# Altium PCB KUOZHAN.PCBDOC (part 1 of 21)
Units mm, origin at the board's own origin, x right, y up, seen from the top; angles counter-clockwise.
Board outline 165.51 x 116.38 mm, 2 copper layers (Top Layer, Bottom Layer); 171 components, 245 nets, 894 pads, 298 vias.
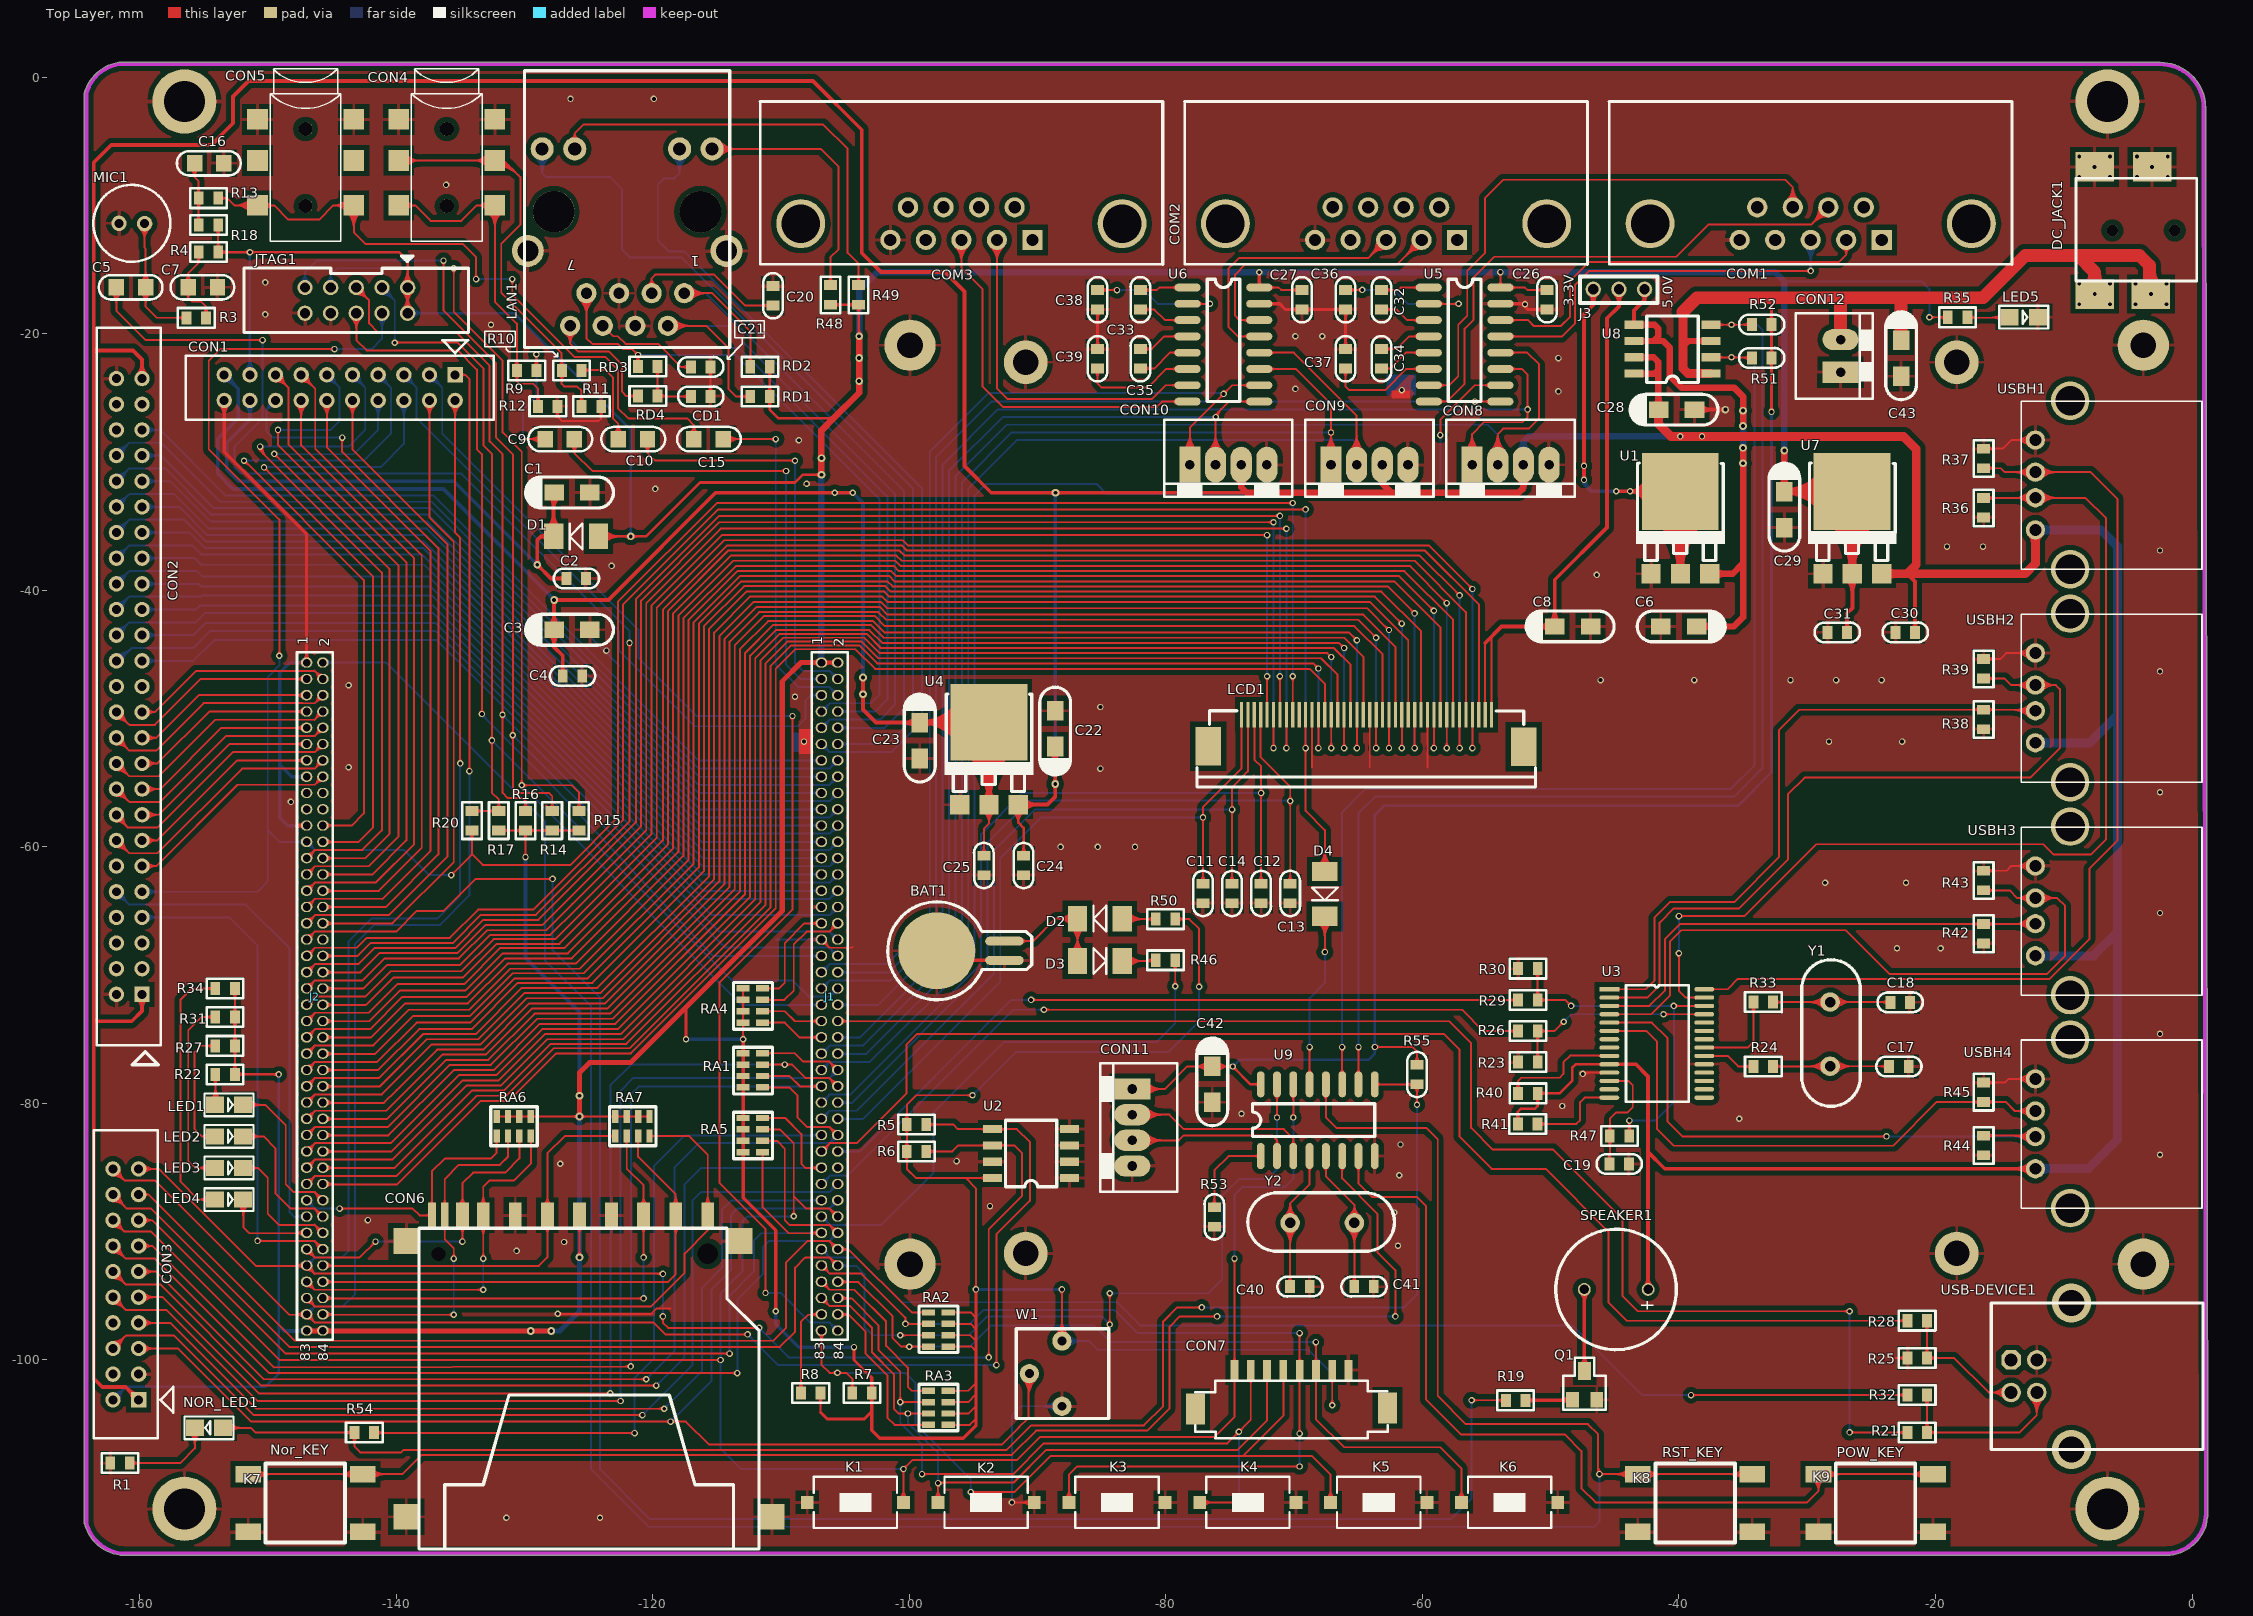
[diagram p0: Top Layer view]
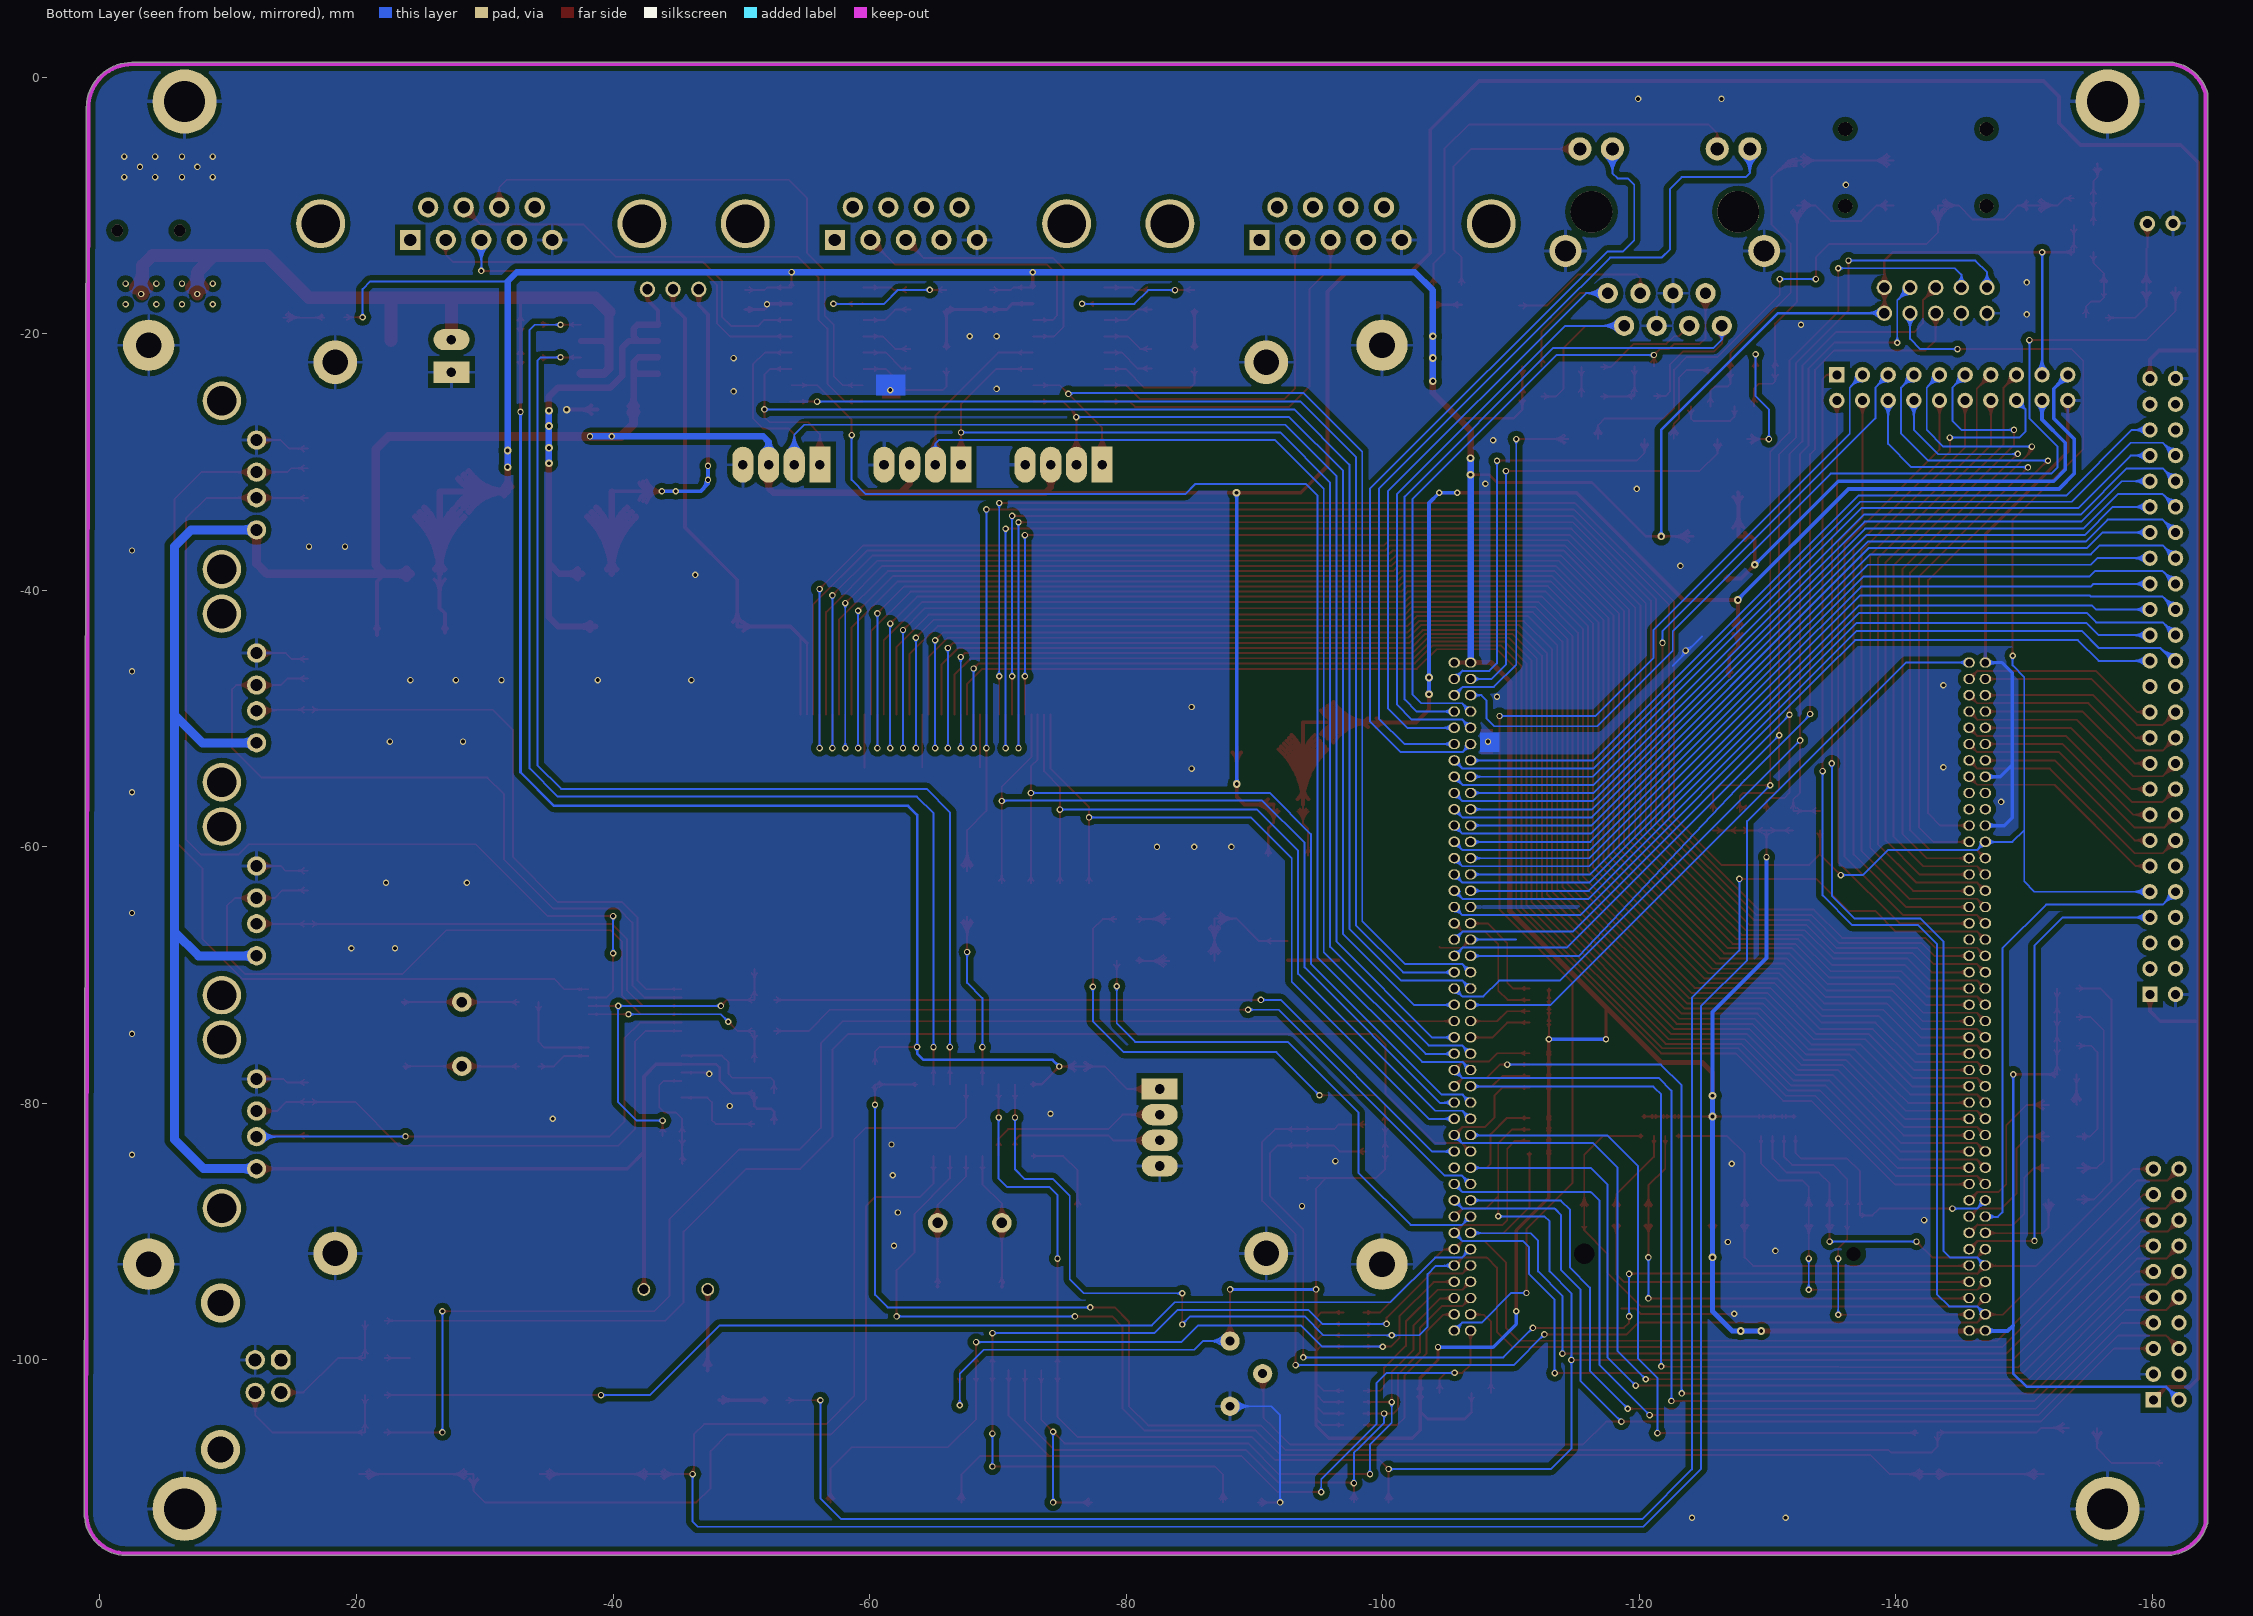
[diagram p1: Bottom Layer view, seen from below]

## Layer stack, top to bottom
Top Layer: signal copper 0.0356
Dielectric: core 0.32, FR-4, Dk 4.8
Bottom Layer: signal copper 0.0356

## Board outline
-164.292,-112.7 -164.292,-112.676 cw(c-161.1,-111.96) -164.293,-112.672 cw(c-164.146,-112.639) -164.292,-112.602 -164.292,-1.335 cw(c-164.145,-1.305) -164.291,-1.267 cw(c-161.123,-2.085) -161.623,1.149 cw(c-161.6,1) -161.6,1.15 -2.5,1.15 cw(c-2.5,-2.4) 1.047,-2.253 cw(c0.904,-2.3) 1.054,-2.3 1.213,-112.2 cw(c1.063,-112.2) 1.198,-112.266 cw(c-2.059,-111.956) -1.723,-115.21 cw(c-1.8,-115.081) -1.8,-115.231 -161.2,-115.231 cw(c-161.2,-115.081) -161.227,-115.229 cw(c-161.1,-111.96) -164.266,-112.785 cw(c-164.142,-112.7)

## Design rules (kind name [scope] priority, off if disabled: settings)
Clearance [All] p1: gap=0.15
FabricationTestPointUsage TestPointUsage [All] p1: valid=0 allowmultiple=FALSE
FabricationTestpoint Testpoint [All] p1: side=3 testpointundercomponent=TRUE minsize=1.016 maxsize=2.54 preferedsize=1.524 minholesize=0 maxholesize=1.016 preferedholesize=0.813 testpointgrid=0.025 allowsidetop=TRUE allowsidebottom=TRUE usegrid=TRUE gridtolerance=0
PolygonConnect GND-Via [IsVia] p1: connectstyle=Direct reliefconductorwidth=0.254 reliefentries=4 polygonreliefangle="90 Angle"
PolygonConnect [All] p2: connectstyle=Relief reliefconductorwidth=0.254 reliefentries=4 polygonreliefangle="90 Angle"
RoutingVias [All] p1: holewidth=0.5 width=0.8 viastyle="Through Hole" minholewidth=0.2 minwidth=0.4 maxholewidth=4 maxwidth=5
SilkscreenOverComponentPads [All] p1: minsilkscreentomaskgap=0.254
SolderMaskExpansion [All] p1: expansion=0.1
Width [All] p1: maxlimit=1 minlimit=0.15 preferedwidth=0.3
25 further rules are at their usual default settings.

## Classes and differential pairs
component class UART_USB_POWER: C22 C23 C24 C25 C26 C27 C28 C29 C30 C31 C32 C33 C34 C35 C36 C37 C38 C39 C40 C41 C42 C43 COM1 COM2 COM3 CON8 CON9 CON10 CON11 CON12 D4 DC_JACK1 K7 K8 K9 NOR_LED1 R1 R51 R52 R53 R54 R55 U4 U5 U6 U7 U8 U9 Y2
component class SD_LAN: BAT1 C17 C18 C19 C20 C21 CD1 CON6 CON7 D2 D3 K1 K2 K3 K4 K5 K6 LAN1 LED1 LED2 LED3 LED4 LED5 R21 R22 R23 R24 R25 R26 R27 R28 R29 R30 R31 R32 R33 R34 R35 R36 R37 R38 R39 R40 R41 R42 R43 R44 R45 R46 R47 R48 R49 R50 RA6 RA7 RD1 RD2 RD3 RD4 U3 USB-DEVICE1 USBH1 USBH2 USBH3 USBH4 Y1
component class INTERFACE: C5 C6 C7 C8 C9 C10 C11 C12 C13 C14 C15 C16 CON4 CON5 J3 JTAG1 LCD1 MIC1 Q1 R3 R4 R5 R6 R7 R8 R9 R10 R11 R12 R13 R14 R15 R16 R17 R18 R19 R20 RA1 RA2 RA3 RA4 RA5 SPEAKER1 U1 U2 W1
component class Audio: C1 C2 C3 C4 CON1 CON2 CON3 D1 J1 J2

## Components (designator, comment, footprint, x,y, rotation, side; value= is the part's Value field where it differs from the comment)
BAT1 "BATTERY" BATT -94.8,-68.1 r0 top
C1 "10uF" 3216A -127.7,-32.4 r180 top
C2 "104" 0603A -126.7,-39.1 r0 top
C3 "10uF" 3216A -127.7,-43.1 r180 top
C4 "104" 0603A -127,-46.7 r0 top
C5 "10uF" 0805C -161.8,-16.4 r270 top
C6 "10uF" 3216A -38.6,-42.8 r0 top
C7 "10uF" 0805C -156.2,-16.4 r270 top
C8 "10uF" 3216A -49.7,-42.842 r180 top
C9 "10uF" 0805C -126.1,-28.2 r90 top
C10 "10uF" 0805C -120.4,-28.2 r90 top
C11 "222" 0603A -77.083,-64.39 r90 top
C12 "222" 0603A -72.55,-64.39 r90 top
C13 "222" 0603A -70.283,-64.39 r90 top
C14 "222" 0603A -74.817,-64.39 r90 top
C15 "10uF" 0805C -114.5,-28.2 r90 top
C16 "10uF" 0805C -155.7,-6.732 r270 top
C17 "15p" 0603A -22.1,-77.1 r180 top
C18 "15p" 0603A -22,-72.1 r180 top
C19 "104" 0603A -43.9,-84.7 r180 top
C20 "104" 0603A -110.6,-17.8 r90 top
C21 "104" 0603A -117,-22.6 r0 top
C22 "10uF" 3216A -88.6,-52.2 r270 top
C23 "10uF" 3216A -99.2,-50.3 r90 top
C24 "104" 0603A -91.1,-60.7 r270 top
C25 "104" 0603A -94.2,-60.7 r270 top
C26 "104" 0603A -50.3,-16.6 r270 top
C27 "104" 0603A -69.4,-16.6 r270 top
C28 "10uF" 3216A -41.6,-25.942 r180 top
C29 "10uF" 3216A -31.8,-32.3 r90 top
C30 "104" 0603A -21.6,-43.262 r180 top
C31 "104" 0603A -26.9,-43.262 r180 top
C32 "104" 0603A -63.2,-16.6 r270 top
C33 "104" 0603A -82,-16.6 r270 top
C34 "104" 0603A -63.2,-21.2 r270 top
C35 "104" 0603A -82,-21.2 r270 top
C36 "104" 0603A -66,-16.6 r270 top
C37 "104" 0603A -65.967,-22.71 r90 top
C38 "104" 0603A -85.333,-16.6 r270 top
C39 "104" 0603A -85.3,-22.71 r90 top
C40 "104" 0603A -70.3,-94.3 r0 top
C41 "104" 0603A -65.3,-94.3 r0 top
C42 "10uF" 3216A -76.4,-77.1 r90 top
C43 "10uF" 3216A -22.7,-20.5 r90 top
CD1 "104" 0603A -117,-24.9 r0 top
COM1 "" DB9RA/M -24.2,-12.7 r0 top
COM2 "" DB9RA/M -57.3,-12.7 r0 top
COM3 "" DB9RA/M -90.4,-12.7 r0 top
CON1 "CON20" IDC20SS -135.4,-23.2 r0 top
CON2 "IDC25x2" IDC25X2 -159.8,-71.5 r180 top
CON3 "HEADER 10X2" IDC20SS -160.065,-103.1 r270 top
CON4 "EARJACK" MIN_PHONE -139.8,-10 r0 top
CON5 "MIC_IN" MIN_PHONE -150.8,-10 r0 top
CON6 "SD/MMC CARD" SDCARD -118.2,-88.7 r180 top
CON7 "CON8" SMD8 -70.2,-102.3 r0 top
CON8 "CON4" SIP4-FA2 -56.1,-30.2 r0 top
CON9 "CON4" SIP4-FA2 -67.1,-30.2 r0 top
CON10 "CON4" SIP4-FA2 -78.1,-30.2 r0 top
CON11 "CON4" SIP4-FA2 -82.6,-78.9 r270 top
CON12 "CON12" SIP2-FA2 -27.4,-23 r90 top
D1 "1N4148" D1206 -124.2,-35.8 r180 top
D2 "1N4148" D1206 -83.371,-65.6 r180 top
D3 "1N4148" D1206 -86.9,-68.9 r0 top
D4 "1N4007" D1206 -67.6,-61.9 r270 top
DC_JACK1 "Header 4" DC-33 -7.6,-7 r0 top
J1 "CONN PLUG 42 x 2" DIP84 -106.841,-45.638 r0 top locked
J2 "CONN PLUG 42 x 2" DIP84 -146.973,-45.638 r0 top locked
J3 "J3" SIP3S -46.7,-16.6 r0 top
JTAG1 "HEADER 4X2" IDC10S -139.1,-16.4 r180 top
K1 "RST_KEY" SW-PB2 -104.2,-111.1 r180 top
K2 "RST_KEY" SW-PB2 -94,-111.1 r0 top
K3 "RST_KEY" SW-PB2 -83.8,-111.1 r0 top
K4 "RST_KEY" SW-PB2 -73.6,-111.1 r0 top
K5 "RST_KEY" SW-PB2 -63.4,-111.1 r0 top
K6 "RST_KEY" SW-PB2 -53.2,-111.1 r0 top
K7 "Nor_KEY" KEY-4 -142.6,-113.4 r180 top
K8 "RST_KEY" KEY-4 -43.2,-108.9 r0 top
K9 "POW_KEY" KEY-4 -20.2,-113.4 r180 top
LAN1 "HR911103A" HR911103A -122,-10.5 r0 top
LCD1 "LCD41P" LCD-40 -54.6,-49.7 r180 top
LED1 "GREEN" LED -154.1,-80.1 r0 top
LED2 "GREEN" LED -154.1,-82.561 r0 top
LED3 "GREEN" LED -154.1,-85.021 r0 top
LED4 "GREEN" LED -154.1,-87.482 r0 top
LED5 "P-LED" LED -14.2,-18.7 r0 top
MIC1 "MICROPHONE1" MIC2 -160.6,-11.4 r0 top
NOR_LED1 "NOR_LED" LED -153.5,-105.3 r180 top
Q1 "8050" SOT23 -48.3,-103.1 r0 top
R1 "1K" 0603R -162.3,-108 r0 top
R3 "4.7K" 0603R -154.8,-18.8 r180 top
R4 "100" 0603R -155.4,-13.6 r0 top
R5 "10K" 0603R -100.2,-81.6 r0 top
R6 "10K" 0603R -100.2,-83.7 r0 top
R7 "10K" 0603R -102.9,-102.6 r180 top
R8 "10K" 0603R -106.9,-102.6 r180 top
R9 "330" 0603R -130.587,-22.84 r0 top
R10 "330" 0603R -127.087,-22.84 r0 top
R11 "10K" 0603R -124,-25.7 r180 top
R12 "10K" 0603R -127.4,-25.7 r180 top
R13 "4.7K" 0603R -155.4,-9.4 r0 top
R14 "10K" 0603R -127.866,-58.737 r90 top
R15 "10K" 0603R -125.781,-58.737 r90 top
R16 "10K" 0603R -129.951,-58.737 r90 top
R17 "10K" 0603R -132.035,-58.737 r90 top
R18 "100" 0603R -155.4,-11.5 r0 top
R19 "1.5K" 0603R -53.5,-103.1 r0 top
R20 "1K" 0603R -134.038,-57.187 r270 top
R21 "1.5K" 0603R -22.2,-105.6 r0 top
R22 "1K" 0603R -154.1,-77.7 r0 top
R23 "15K" 0603R -51,-76.825 r180 top
R24 "330" 0603R -34.2,-77.069 r0 top
R25 "470K" 0603R -20.651,-99.882 r180 top
R26 "22" 0603R -51,-74.397 r180 top
R27 "1K" 0603R -154.1,-75.467 r0 top
R28 "22" 0603R -22.2,-96.9 r0 top
R29 "22" 0603R -51,-71.969 r180 top
R30 "15K" 0603R -51,-69.54 r180 top
R31 "1K" 0603R -154.1,-73.233 r0 top
R32 "22" 0603R -22.2,-102.7 r0 top
R33 "330" 0603R -34.2,-72.069 r0 top
R34 "1K" 0603R -154.1,-71 r0 top
R35 "560" 0603R -17.5,-18.76 r180 top
R36 "15K" 0603R -16.2,-32.8 r270 top
R37 "15K" 0603R -16.282,-30.5 r90 top
R38 "15K" 0603R -16.2,-49.3 r270 top
R39 "15K" 0603R -16.282,-46.9 r90 top
R40 "15K" 0603R -52.549,-79.172 r0 top
R41 "15K" 0603R -51.013,-81.64 r180 top
R42 "15K" 0603R -16.2,-66 r270 top
R43 "15K" 0603R -16.282,-63.4 r90 top
R44 "15K" 0603R -16.2,-82.5 r270 top
R45 "15K" 0603R -16.282,-79.9 r90 top
R46 "10K" 0603R -80.8,-68.8 r0 top
R47 "1.5K" 0603R -45.4,-82.5 r0 top
R48 "1K" 0603R -106.1,-16.2 r270 top
R49 "1K" 0603R -103.9,-16.2 r270 top
R50 "10K" 0603R -80.8,-65.6 r0 top
R51 "100K" 0603A -34.3,-21.9 r0 top
R52 "100K" 0603A -34.3,-19.3 r0 top
R53 "10K" 0603A -76.2,-89.6 r90 top
R54 "1K" 0603R -141.7,-105.7 r180 top
R55 "1K" 0603A -60.4,-78.5 r90 top
RA1 "10K" R-AR4 -111.4,-78.75 r90 top
RA2 "10K" R-AR4 -98.5,-96.3 r270 top
RA3 "10K" R-AR4 -98.5,-102.4 r270 top
RA4 "10K" R-AR4 -111.4,-73.7 r90 top
RA5 "10K" R-AR4 -111.4,-83.8 r90 top
RA6 "10K" R-AR4 -129.5,-81 r180 top
RA7 "10K" R-AR4 -120.246,-81 r180 top
RD1 "75" 0603R -112.4,-24.849 r0 top
RD2 "75" 0603R -112.4,-22.536 r0 top
RD3 "75" 0603R -119.6,-22.6 r180 top
RD4 "75" 0603R -119.6,-24.9 r180 top
SPEAKER1 "SPEAKER" SPEAKER-9 -44.9,-94.5 r180 top
U1 "LM1117-33" TO-252 -37.6,-38.7 r0 top
U2 "24C08" SOP8-50-160 -87.5,-85.8 r180 top
U3 "AU9254" AU9254 -45,-71.1 r0 top
U4 "LM1117-1.8V" TO-252 -91.5,-56.7 r0 top
U5 "MAX3232SOP" SSOP16 -59.5,-16.4 r90 top
U6 "MAX3232SOP" SSOP16 -78.3,-16.4 r90 top
U7 "LM1117-33" TO-252 -24.2,-38.7 r0 top
U8 "IRF7316" SOP8-50-160 -37.5,-23.1 r180 top
U9 "STC11F02E" SSOP16 -72.6,-84.1 r180 top
USB-DEVICE1 "USB Port A type" USB-B -14.1,-100 r90 top
USBH1 "USB Port A type" USB-A -12.2,-35.3 r90 top
USBH2 "USB Port A type" USB-A -12.2,-51.9 r90 top
USBH3 "USB Port A type" USB-A -12.2,-68.5 r90 top
USBH4 "USB Port A type" USB-A -12.2,-85.1 r90 top
W1 "10K" R_ADJ7 -88.1,-103.6 r90 top
Y1 "12MHz" OSC2PR-1 -28.2,-77.1 r90 top
Y2 "XTAL" OSC2PR-1 -65.3,-89.3 r180 top

## Footprints (in the part's own frame and the unit in brackets; to place one, negate y for a bottom-side part, rotate by r counter-clockwise, add the part's x,y. Pads: shape width x height; smd on the part's side, far side on the other; paste and mask are expansions set on the pad)
0603A [mil]
  rect 30x40 smd: 1(-0.39,0.65) 2(59.61,0.65)
  silkscreen extent -40,-30 99,31
0603R [mil]
  rect 30x40 smd: 1(0.5,-1.59) 2(60.5,-1.59)
  silkscreen extent -26,-32 87,28
0805C [mm]
  rect 1.3x1.2 smd: 1(-0.019,-0.004) 2(-0.019,2.282)
  silkscreen extent -0.97,-1.38 0.93,3.59
3216A [mil]
  rect 60x50 smd: 1(-0.8,-0.83) 2(-110.8,-0.83)
  silkscreen extent -183,-48 87,46
AU9254 [mm]
  rect 1.55x0.33 smd: 1(-0.425,0)
  oval 1.55x0.33 smd: 2(-0.425,-0.65) 3(-0.425,-1.3) 4(-0.425,-1.95) 5(-0.425,-2.6) 6(-0.425,-3.25) 7(-0.425,-3.9) 8(-0.425,-4.55) 9(-0.425,-5.2) 10(-0.425,-5.85) 11(-0.425,-6.5) 12(-0.425,-7.15) 13(-0.425,-7.8) 14(-0.425,-8.45) 15(6.975,-8.45) 16(6.975,-7.8) 17(6.975,-7.15) 18(6.975,-6.5) 19(6.975,-5.85) 20(6.975,-5.2) 21(6.975,-4.55) 22(6.975,-3.9) 23(6.975,-3.25) 24(6.975,-2.6) 25(6.975,-1.95) 26(6.975,-1.3) 27(6.975,-0.65) 28(6.975,0)
  silkscreen extent 0.87,-8.78 5.75,0.33
BATT [mm]
  oval 3x0.7 smd: 1(2.223,0.75) 2(2.223,-0.75)
  round 6 smd: 2(-3.048,0)
  Top Layer lines w0.254: -1.785,-0.75 2.223,-0.75
  silkscreen extent -6.87,-3.82 4.34,3.82
D1206 [mm]
  rect 1.5x2 smd: 1(0.015,0.001) 2(3.515,0.001)
  silkscreen extent 1.26,-1 2.26,1
DB9RA/M [mil]
  rect 62x62 hole 38: 1(0.38,0.31)
  round 62 hole 38: 2(-108.62,0.31) 3(-217.62,0.31) 4(-326.62,0.31) 5(-435.62,0.31) 6(-54.62,100.31) 7(-163.62,100.31) 8(-272.62,100.31) 9(-381.62,100.31)
  round 150 hole 118.11: ""(-710.62,50.31) ""(275.38,50.31)
  silkscreen extent -836,-75 400,425
DC-33 [mm]
  rect 3x2.3 smd: 1(0,0) 2(0.013,-9.906) 3(4.39,-9.906) 4(4.478,0)
  silkscreen extent -1.45,-8.89 7.95,-0.89
DIP84 [mm]
  oval 0.9x0.8 hole 0.6: 1(0,-0.001) 2(1.27,-0.001) 3(0,-1.271) 4(1.27,-1.271) 5(0,-2.541) 6(1.27,-2.541) 7(0,-3.811) 8(1.27,-3.811) 9(0,-5.081) 10(1.27,-5.081) 11(0,-6.351) 12(1.27,-6.351) 13(0,-7.621) 14(1.27,-7.621) 15(0,-8.891) 16(1.27,-8.891) 17(0,-10.161) 18(1.27,-10.161) 19(0,-11.431) 20(1.27,-11.431) 21(0,-12.701) 22(1.27,-12.701) 23(0,-13.971) 24(1.27,-13.971) 25(0,-15.241) 26(1.27,-15.241) 27(0,-16.511) 28(1.27,-16.511) 29(0,-17.781) 30(1.27,-17.781) 31(0,-19.051) 32(1.27,-19.051) 33(0,-20.321) 34(1.27,-20.321) 35(0,-21.591) 36(1.27,-21.591) 37(0,-22.861) 38(1.27,-22.861) 39(0,-24.131) 40(1.27,-24.131) 41(0,-25.401) 42(1.27,-25.401) 43(0,-26.671) 44(1.27,-26.671) 45(0,-27.941) 46(1.27,-27.941) 47(0,-29.211) 48(1.27,-29.211) 49(0,-30.481) 50(1.27,-30.481) 51(0,-31.751) 52(1.27,-31.751) 53(0,-33.021) 54(1.27,-33.021) 55(0,-34.291) 56(1.27,-34.291) 57(0,-35.561) 58(1.27,-35.561) 59(0,-36.831) 60(1.27,-36.831) 61(0,-38.101) 62(1.27,-38.101) 63(0,-39.371) 64(1.27,-39.371) 65(0,-40.641) 66(1.27,-40.641) 67(0,-41.911) 68(1.27,-41.911) 69(0,-43.181) 70(1.27,-43.181) 71(0,-44.451) 72(1.27,-44.451) 73(0,-45.721) 74(1.27,-45.721) 75(0,-46.991) 76(1.27,-46.991) 77(0,-48.261) 78(1.27,-48.261) 79(0,-49.531) 80(1.27,-49.531) 81(0,-50.801) 82(1.27,-50.801) 83(0,-52.071) 84(1.27,-52.071)
  silkscreen extent -0.75,-52.8 2.05,0.8
HR911103A [mm]
  round 1.575 hole 0.889: 1(4.462,-6.344) 2(3.192,-8.884) 3(1.922,-6.344) 4(0.652,-8.884) 5(-0.618,-6.344) 6(-1.888,-8.884) 7(-3.158,-6.344) 8(-4.428,-8.884)
  round 1.8 hole 1.02: 9(6.642,4.906) 10(4.102,4.906) 11(-4.068,4.906) 12(-6.608,4.906)
  round 2.5 hole 1.63: A(7.762,-3.044) B(-7.728,-3.044)
  round 3.25 hole 3.25: C(-5.698,0.006) D(5.732,0.006)
  silkscreen extent -7.98,-10.58 8.02,11.01
IDC10S [mm]
  round 1.2 hole 0.8: 1(-0.001,0.003) 2(-0.001,2.003) 3(1.999,0.003) 4(1.999,2.003) 5(3.999,0.003) 6(3.999,2.003) 7(5.999,0.003) 8(5.999,2.003) 9(7.999,0.003) 10(7.999,2.003)
  silkscreen extent -4.75,-2.47 12.75,3.5
IDC20SS [mm]
  rect 1.2x1.2 hole 0.7: 1(0.006,-0.003)
  round 1.2 hole 0.7: 2(0.006,-2.003) 3(-1.994,-0.003) 4(-1.994,-2.003) 5(-3.994,-0.003) 6(-3.994,-2.003) 7(-5.994,-0.003) 8(-5.994,-2.003) 9(-7.994,-0.003) 10(-7.994,-2.003) 11(-9.994,-0.003) 12(-9.994,-2.003) 13(-11.994,-0.003) 14(-11.994,-2.003) 15(-13.994,-0.003) 16(-13.994,-2.003) 17(-15.994,-0.003) 18(-15.994,-2.003) 19(-17.994,-0.003) 20(-17.994,-2.003)
  silkscreen extent -20.99,-3.5 3.01,2.7
IDC25X2 [mm]
  rect 1.2x1.2 hole 0.7: 1(0,0)
  round 1.2 hole 0.7: 2(2,0) 3(0,-2) 4(2,-2) 5(0,-4) 6(2,-4) 7(0,-6) 8(2,-6) 9(0,-8) 10(2,-8) 11(0,-10) 12(2,-10) 13(0,-12) 14(2,-12) 15(0,-14) 16(2,-14) 17(0,-16) 18(2,-16) 19(0,-18) 20(2,-18) 21(0,-20) 22(2,-20) 23(0,-22) 24(2,-22) 25(0,-24) 26(2,-24) 27(0,-26) 28(2,-26) 29(0,-28) 30(2,-28) 31(0,-30) 32(2,-30) 33(0,-32) 34(2,-32) 35(0,-34) 36(2,-34) 37(0,-36) 38(2,-36) 39(0,-38) 40(2,-38) 41(0,-40) 42(2,-40) 43(0,-42) 44(2,-42) 45(0,-44) 46(2,-44) 47(0,-46) 48(2,-46) 49(0,-48) 50(2,-48)
  silkscreen extent -1.46,-51.96 3.54,5.48
KEY-4 [mm]
  rect 2x1.3 smd: 1(0,0) 2(8.925,0) 3(8.925,-4.5) 4(0,-4.5)
  silkscreen extent 1.38,-5.33 7.58,0.83
LCD-40 [mm]
  rect 0.25x2 smd: 1(0,0) 2(0.5,0) 3(1,0) 4(1.5,0) 5(2,0) 6(2.5,0) 7(3,0) 8(3.5,0) 9(4,0) 10(4.5,0) 11(5,0) 12(5.5,0) 13(6,0) 14(6.5,0) 15(7,0) 16(7.5,0) 17(8,0) 18(8.5,0) 19(9,0) 20(9.5,0) 21(10,0) 22(10.5,0) 23(11,0) 24(11.5,0) 25(12,0) 26(12.5,0) 27(13,0) 28(13.5,0) 29(14,0) 30(14.5,0) 31(15,0) 32(15.5,0) 33(16,0) 34(16.5,0) 35(17,0) 36(17.5,0) 37(18,0) 38(18.5,0) 39(19,0) 40(19.5,0)
  rect 2x3 smd: ""(-2.5,2.5) ""(22.087,2.449)
  silkscreen extent -3.41,-0.3 22.98,5.63
LED [mm]
  rect 1.4x1.27 smd: 1(-0.025,-0.01) 2(2.185,-0.01)
  silkscreen extent -0.82,-0.9 2.99,0.88
MIC2 [mm]
  round 1.2 hole 0.7: 1(1,-0.025) 2(-1,0)
  silkscreen extent -3,-3 3,3
MIN_PHONE [mm]
  rect 1.6x1.6 smd: 1(0,6.7) 2(7.508,6.7) 3(0,3.5) 4(7.508,3.5) 5(0,0) 6(7.508,0)
  round 1.1 hole 1.1: ""(3.75,-0.05) ""(3.75,5.955)
  silkscreen extent 1,-2.8 6.5,10.65
OSC2PR-1 [mil]
  round 60 hole 32: 1(-0.1,0.32) 2(196.9,0.32)
  silkscreen extent -123,-92 327,88
R-AR4 [mm]
  rect 0.5x1.016 smd: 1(-0.004,0.02) 2(0.885,0.02) 3(1.774,0.02) 4(2.663,0.02) 5(2.663,1.544) 6(1.774,1.544) 7(0.885,1.544) 8(-0.004,1.544)
  silkscreen extent -0.51,-0.74 3.12,2.31
R_ADJ7 [mm]
  round 1.5 hole 0.7: 1(-0.007,-0.005) 2(5.073,-0.005) 3(2.533,2.535)
  silkscreen extent -0.97,-3.64 6.03,3.56
SDCARD [mm]
  rect 1x2 smd: 1(0.003,0.029) 2(2.503,0.029) 3(5.003,0.029) 4(7.503,0.029) 5(10.003,0.029) 6(12.503,0.029) 7(15.003,0.029) 8(16.628,0.029) 9(-2.497,0.029)
  rect 0.6x2 smd: 10(19.003,0.029) 11(18.003,0.029)
  rect 2x2 smd: 12(-4.997,2.029) 13(21.003,2.029) 14(21.003,23.529) 15(-7.497,23.529)
  round 1.5 hole 1.6: 16(-2.497,3.029)
  round 1 hole 1.1: 17(18.503,3.029)
  silkscreen extent -6.5,1.03 20,26.03
SIP2-FA2 [mm]
  rect 1.651x2.8 hole 0.75: 1(0,0)
  oval 1.651x2.8 hole 0.75: 2(2.54,0)
  silkscreen extent -2.08,-2.54 4.59,3.5
SIP3S [mm]
  round 1.2 hole 0.8: 1(0.023,0.055) 2(2.023,0.055) 3(4.023,0.055)
  silkscreen extent -1,-1.02 5.02,1.05
SIP4-FA2 [mm]
  rect 1.651x2.8 hole 0.75: 1(-0.022,-0.01)
  oval 1.651x2.8 hole 0.75: 2(1.978,-0.01) 3(3.978,-0.01) 4(5.978,-0.01)
  silkscreen extent -2.02,-2.51 7.97,3.49
SMD8 [mm]
  rect 0.6x1.6 smd: 1(-4.445,1.512) 2(-3.175,1.512) 3(-1.905,1.512) 4(-0.635,1.512) 5(0.635,1.512) 6(1.905,1.512) 7(3.175,1.512) 8(4.445,1.512)
  rect 1.5x2.4 smd: A(-7.49,-1.512) B(7.49,-1.438)
  silkscreen extent -7.49,-3.79 7.49,0.69
SOP8-50-160 [mm]
  rect 1.5x0.635 smd: 1(-0.002,0.012) 2(-0.002,-1.258) 3(-0.002,-2.528) 4(-0.002,-3.798) 5(5.998,-3.798) 6(5.998,-2.528) 7(5.998,-1.258) 8(5.998,0.012)
  silkscreen extent 1,-4.49 5,0.7
SOT23 [mm]
  rect 1x1.2 smd: B(-0.006,-0.008) E(1.894,-0.008)
  rect 1x1.4 smd: C(0.944,2.258)
  silkscreen extent -0.71,-0.79 2.6,3.27
SPEAKER-9 [mm]
  round 1 hole 0.75: 1(-2.5,0) 2(2.475,0)
  silkscreen extent -4.7,-4.7 4.69,4.7
SSOP16 [mil]
  oval 24x80 smd: 1(0,0) 2(-50,0) 3(-100,0) 4(-150,0) 5(-200,0) 6(-250,0) 7(-300,0) 8(-350,0) 9(-350,-220) 10(-300,-220) 11(-250,-220) 12(-200,-220) 13(-150,-220) 14(-100,-220) 15(-50,-220) 16(0,-220)
  silkscreen extent -350,-160 25,-60
SW-PB2 [mm]
  rect 1x1 smd: 1(-3.75,0) 2(3.75,0)
  silkscreen extent -3.25,-2 3.25,2
TO-252 [mm]
  rect 1.5x1.5 smd: 1(0.003,-0.012) 2(-4.569,-0.012) 3(-2.283,-0.012)
  rect 6x6 smd: 4(-2.297,6.413)
  silkscreen extent -5.75,1.01 1.18,8.61
USB-A [mm]
  round 1.5 hole 0.92: 1(0.009,0.013) 2(2.509,0.013) 3(4.509,0.013) 4(7.009,0.013)
  round 3 hole 2.3: 5(10.079,-2.697) 6(-3.061,-2.697)
  silkscreen extent -3.06,-12.98 10.04,1.12
USB-B [mil]
  oct 60x60 hole 40: 1(0.24,0.17)
  round 60 hole 40: 2(-99.76,0.17) 3(-99.76,-78.57) 4(0.24,-78.57)
  round 120 hole 80: 5(175.24,-184.87) 6(-274.76,-184.87)
  silkscreen extent -275,-589 175,61

## Part data
C1 C3 C5 C6 C7 C8 C9 C10 C15 C16 C22 C23 C28 C29 C42 C43: library part CAPACITOR, "Capacitor"
C2 C4 C24 C25 C30 C31: library part CAP, "Capacitor"
C11 C12 C13 C14: library part Cap, "Capacitor"
C17 C18 C19 C26 C27 C32 C33 C34 C35 C36 C37 C38 C39 C40 C41 CD1: library part CAP
C20 C21: library part "CAP NP_0"
COM1 COM2 COM3: library part "CONNECTOR DB9"
CON1 CON7 CON8 CON9 CON10 CON11: "Connector"
CON5: library part EARJACK
CON6: library part SD
CON12: library part "Header 2H", "Header, 2-Pin, Right Angle"
D1 D2 D3 D4: library part DIODE
DC_JACK1: "Header, 4-Pin"
J3: library part CON3, "Connector"
JTAG1: library part "HEADER 5X2"
K1 K2 K3 K4 K5 K6: library part SW-PB, "Switch"
K7 K8 K9: library part PUSHSW
LED1 LED2 LED3 LED4 LED5: library part LED
MIC1: "Microphone"
NOR_LED1: library part LED0, "Typical INFRARED GaAs LED"
Q1: library part NPN
R1 R3 R4 R5 R6 R7 R8 R9 R10 R11 R12 R13 R18 R19 R46 R48 R49 R50 R54: library part RES1
R14 R15 R16 R17 R20 R22 R24 R27 R31 R33 R34 R35: library part RES
R21 R23 R25 R26 R28 R29 R30 R32 R36 R37 R38 R39 R40 R41 R42 R43 R44 R45 R47: library part RESISTOR_2
R51 R52 R53 R55: library part Res2, "Resistor"
RA1 RA2 RA3 RA4 RA5 RA6 RA7: library part RP4R
RD1 RD2 RD3 RD4: library part RES2
U2: library part AT24LC04, "U"
U3: library part USBHUB
U4: library part LM1117-33
U5 U6: library part MAX232SOP
USB-DEVICE1 USBH1 USBH2 USBH3 USBH4: library part USBPORT
W1: library part "RESISTOR TAPPED"
Y1: library part CRYSTAL
Y2: "Crystal Oscillator"

## Free pads (board coordinates)
  round 4 hole 2: 0(-3.8,-92.528) 1(-99.939,-92.528) 1(-99.939,-20.9) 1(-3.8,-20.9)
  round 5 hole 3.2: ""(-156.5,-111.6) ""(-156.5,-1.9) ""(-6.6,-111.6) ""(-6.6,-1.9)
  round 3.4 hole 2: ""(-90.912,-91.693) ""(-90.912,-22.229) ""(-18.341,-91.693) ""(-18.341,-22.229)

## Via types
v1: diameter 0.5, hole 0.3, Top Layer to Bottom Layer, 272 vias
v2: diameter 0.6, hole 0.3, Top Layer to Bottom Layer, 24 vias
v3: diameter 0.9, hole 0.9, Top Layer to Bottom Layer, 2 vias

## Nets (pads, with @x,y where several pads share a name; then routed paths per layer and width w, separated by ;. In a path a pad name is that pad's centre, name@x,y a point inside that pad or via, vN(x,y) a via of type N, cw(c..) or ccw(c..) an arc to the next point about the centre after c; other vN are vias at no path point)
AIN0: CON3.5 J1.68 W1.3 | length 173.1
  Top Layer w0.15: CON3.5@-160.067,-99.106 -156.994,-99.106 -151.3,-104.8 v1(-118.6,-104.8) -117.4,-104.8 -115.6,-106.6 -92.8,-106.6 -91.4,-105.2 ; v1@-118.688,-104.888 ccw(c-118.902,-105.102) -118.902,-104.8 ccw(c-118.902,-104.498) v1@-118.688,-104.712 ; v1@-118.512,-104.888 cw(c-118.298,-105.102) -118.298,-104.8 cw(c-118.298,-104.498) v1@-118.512,-104.712 ; -91.5,-105.3 -90.7,-104.5 W1.3@-90.7,-101 ; CON3.5@-159.802,-99.372 cw(c-159.162,-100.012) -159.162,-99.106 ; CON3.5@-159.802,-99.372 cw(c-159.162,-100.012) -159.162,-99.106 ; CON3.5@-159.802,-99.372 cw(c-159.162,-100.012) -159.162,-99.106 ; CON3.5@-159.802,-99.372 cw(c-159.162,-100.012) -159.162,-99.106 ; CON3.5@-159.802,-99.372 cw(c-159.162,-100.012) -159.162,-99.106 ; CON3.5@-159.802,-98.841 ccw(c-159.162,-98.201) -159.162,-99.106 ; CON3.5@-159.802,-98.841 ccw(c-159.162,-98.201) -159.162,-99.106 ; CON3.5@-159.802,-98.841 ccw(c-159.162,-98.201) -159.162,-99.106 ; CON3.5@-159.802,-98.841 ccw(c-159.162,-98.201) -159.162,-99.106 ; CON3.5@-159.802,-98.841 ccw(c-159.162,-98.201) -159.162,-99.106 ; CON3.5@-159.696,-99.478 cw(c-158.8,-100.374) -158.8,-99.106 ; CON3.5@-159.696,-99.478 cw(c-158.8,-100.374) -158.8,-99.106 ; CON3.5@-159.696,-99.478 cw(c-158.8,-100.374) -158.8,-99.106 ; CON3.5@-159.696,-99.478 cw(c-158.8,-100.374) -158.8,-99.106 ; CON3.5@-159.696,-99.478 cw(c-158.8,-100.374) -158.8,-99.106 ; CON3.5@-159.696,-98.735 ccw(c-158.8,-97.839) -158.8,-99.106 ; CON3.5@-159.696,-98.735 ccw(c-158.8,-97.839) -158.8,-99.106 ; CON3.5@-159.696,-98.735 ccw(c-158.8,-97.839) -158.8,-99.106 ; CON3.5@-159.696,-98.735 ccw(c-158.8,-97.839) -158.8,-99.106 ; CON3.5@-159.696,-98.735 ccw(c-158.8,-97.839) -158.8,-99.106 ; -119.022,-104.8 cw(c-119.022,-105.222) v1@-118.724,-104.924 ; -119.022,-104.8 ccw(c-119.022,-104.378) v1@-118.724,-104.676 ; -119.022,-104.8 cw(c-119.022,-105.222) v1@-118.724,-104.924 ; -119.022,-104.8 ccw(c-119.022,-104.378) v1@-118.724,-104.676 ; -119.022,-104.8 cw(c-119.022,-105.222) v1@-118.724,-104.924 ; -119.022,-104.8 ccw(c-119.022,-104.378) v1@-118.724,-104.676 ; -119.022,-104.8 ccw(c-119.022,-104.378) v1@-118.724,-104.676 ; -119.022,-104.8 cw(c-119.022,-105.222) v1@-118.724,-104.924 ; v1@-118.476,-104.924 cw(c-118.178,-105.222) -118.178,-104.8 ; v1@-118.476,-104.924 cw(c-118.178,-105.222) -118.178,-104.8 ; v1@-118.476,-104.924 cw(c-118.178,-105.222) -118.178,-104.8 ; v1@-118.476,-104.924 cw(c-118.178,-105.222) -118.178,-104.8 ; v1@-118.476,-104.676 ccw(c-118.178,-104.378) -118.178,-104.8 ; v1@-118.476,-104.676 ccw(c-118.178,-104.378) -118.178,-104.8 ; v1@-118.476,-104.676 ccw(c-118.178,-104.378) -118.178,-104.8 ; v1@-118.476,-104.676 ccw(c-118.178,-104.378) -118.178,-104.8 ; W1.3@-91.112,-101.544 cw(c-92.108,-102.539) -90.7,-102.539 ; W1.3@-91.112,-101.544 cw(c-92.108,-102.539) -90.7,-102.539 ; W1.3@-91.112,-101.544 cw(c-92.108,-102.539) -90.7,-102.539 ; W1.3@-91.112,-101.544 cw(c-92.108,-102.539) -90.7,-102.539 ; W1.3@-91.112,-101.544 cw(c-92.108,-102.539) -90.7,-102.539 ; W1.3@-91.006,-101.438 cw(c-91.746,-102.177) -90.7,-102.177 ; W1.3@-91.006,-101.438 cw(c-91.746,-102.177) -90.7,-102.177 ; W1.3@-91.006,-101.438 cw(c-91.746,-102.177) -90.7,-102.177 ; W1.3@-91.006,-101.438 cw(c-91.746,-102.177) -90.7,-102.177 ; W1.3@-91.006,-101.438 cw(c-91.746,-102.177) -90.7,-102.177 ; W1.3@-90.9,-101.332 cw(c-91.384,-101.815) -90.7,-101.815 ; W1.3@-90.9,-101.332 cw(c-91.384,-101.815) -90.7,-101.815 ; W1.3@-90.9,-101.332 cw(c-91.384,-101.815) -90.7,-101.815 ; W1.3@-90.9,-101.332 cw(c-91.384,-101.815) -90.7,-101.815 ; W1.3@-90.9,-101.332 cw(c-91.384,-101.815) -90.7,-101.815 ; -90.7,-102.853 cw(c-88.849,-102.853) W1.3@-90.158,-101.544 ; -90.7,-102.853 cw(c-88.849,-102.853) W1.3@-90.158,-101.544 ; -90.7,-102.853 cw(c-88.849,-102.853) W1.3@-90.158,-101.544 ; -90.7,-102.853 cw(c-88.849,-102.853) W1.3@-90.158,-101.544 ; -90.7,-102.853 cw(c-88.849,-102.853) W1.3@-90.158,-101.544 ; -90.7,-102.491 cw(c-89.211,-102.491) W1.3@-90.264,-101.438 ; -90.7,-102.491 cw(c-89.211,-102.491) W1.3@-90.264,-101.438 ; -90.7,-102.491 cw(c-89.211,-102.491) W1.3@-90.264,-101.438 ; -90.7,-102.491 cw(c-89.211,-102.491) W1.3@-90.264,-101.438 ; -90.7,-102.491 cw(c-89.211,-102.491) W1.3@-90.264,-101.438 ; -90.7,-102.129 cw(c-89.573,-102.129) W1.3@-90.37,-101.332 ; -90.7,-102.129 cw(c-89.573,-102.129) W1.3@-90.37,-101.332 ; -90.7,-102.129 cw(c-89.573,-102.129) W1.3@-90.37,-101.332 ; -90.7,-102.129 cw(c-89.573,-102.129) W1.3@-90.37,-101.332 ; -90.7,-102.129 cw(c-89.573,-102.129) W1.3@-90.37,-101.332
  Bottom Layer w0.15: v1(-118.6,-104.8) -115.4,-101.6 -115.4,-94.5 -113.9,-93 -113.9,-88.7 -113.423,-88.223 ; v1@-118.6,-104.675 ccw(c-118.6,-104.373) -118.387,-104.587 ccw(c-118.173,-104.8) v1@-118.475,-104.8 ; -113.394,-88.194 -106.216,-88.194 J1.68@-105.571,-87.549 ; -106.217,-88.223 J1.68@-105.571,-87.577 ; v1@-118.6,-104.625 ccw(c-118.6,-104.203) -118.301,-104.501 ; v1@-118.6,-104.625 ccw(c-118.6,-104.203) -118.301,-104.501 ; v1@-118.6,-104.625 ccw(c-118.6,-104.203) -118.301,-104.501 ; v1@-118.6,-104.625 ccw(c-118.6,-104.203) -118.301,-104.501 ; v1@-118.425,-104.8 cw(c-118.003,-104.8) -118.301,-104.501 ; v1@-118.425,-104.8 cw(c-118.003,-104.8) -118.301,-104.501 ; v1@-118.425,-104.8 cw(c-118.003,-104.8) -118.301,-104.501 ; v1@-118.425,-104.8 cw(c-118.003,-104.8) -118.301,-104.501 ; -106.126,-88.132 cw(c-105.571,-88.687) J1.68@-105.571,-87.902 ; -106.126,-88.132 ccw(c-106.68,-87.577) J1.68@-105.896,-87.577 ; -106.126,-88.132 cw(c-105.571,-88.687) J1.68@-105.571,-87.902 ; -106.126,-88.132 ccw(c-106.68,-87.577) J1.68@-105.896,-87.577 ; -106.126,-88.132 cw(c-105.571,-88.687) J1.68@-105.571,-87.902 ; -106.126,-88.132 ccw(c-106.68,-87.577) J1.68@-105.896,-87.577 ; -105.87,-87.876 cw(c-105.571,-88.175) J1.68@-105.571,-87.752 ; -105.87,-87.876 ccw(c-106.168,-87.577) J1.68@-105.746,-87.577 ; -105.87,-87.876 cw(c-105.571,-88.175) J1.68@-105.571,-87.752 ; -105.87,-87.876 ccw(c-106.168,-87.577) J1.68@-105.746,-87.577 ; -105.87,-87.876 cw(c-105.571,-88.175) J1.68@-105.571,-87.752 ; -105.87,-87.876 ccw(c-106.168,-87.577) J1.68@-105.746,-87.577 ; J1.68@-105.621,-87.874 ccw(c-105.621,-88.47) -106.042,-88.049 cw(c-105.621,-88.47) J1.68@-105.621,-87.874 ; J1.68@-105.621,-87.874 ccw(c-105.621,-88.538) -106.09,-88.069 cw(c-105.621,-88.538) J1.68@-105.621,-87.874 ; -106.191,-88.169 ccw(c-106.783,-87.577) -105.946,-87.557 cw(c-106.783,-87.577) -106.191,-88.169 ; -106.178,-88.184 ccw(c-106.742,-87.619) -105.945,-87.57 cw(c-106.742,-87.619) -106.178,-88.184 ; -105.943,-87.949 ccw(c-106.3,-87.592) -105.795,-87.56 cw(c-106.3,-87.592) -105.943,-87.949 ; -105.943,-87.922 ccw(c-106.299,-87.566) -105.796,-87.553 cw(c-106.299,-87.566) -105.943,-87.922
AIN1: CON3.6 J1.66 | length 102.8
  Top Layer w0.15: CON3.6@-162.067,-99.106 -161.061,-98.1 -157.3,-98.1 -151.1,-104.3 v1(-120.8,-104.3) ; v1@-120.888,-104.388 ccw(c-121.102,-104.602) -121.102,-104.3 ccw(c-121.102,-103.998) v1@-120.888,-104.212 ; CON3.6@-162.067,-98.731 ccw(c-162.067,-97.826) -161.427,-98.466 ; CON3.6@-162.067,-98.731 ccw(c-162.067,-97.826) -161.427,-98.466 ; CON3.6@-162.067,-98.731 ccw(c-162.067,-97.826) -161.427,-98.466 ; CON3.6@-162.067,-98.731 ccw(c-162.067,-97.826) -161.427,-98.466 ; CON3.6@-162.067,-98.731 ccw(c-162.067,-97.826) -161.427,-98.466 ; CON3.6@-162.067,-98.581 ccw(c-162.067,-97.314) -161.171,-98.21 ; CON3.6@-162.067,-98.581 ccw(c-162.067,-97.314) -161.171,-98.21 ; CON3.6@-162.067,-98.581 ccw(c-162.067,-97.314) -161.171,-98.21 ; CON3.6@-162.067,-98.581 ccw(c-162.067,-97.314) -161.171,-98.21 ; CON3.6@-162.067,-98.581 ccw(c-162.067,-97.314) -161.171,-98.21 ; CON3.6@-161.692,-99.106 cw(c-160.787,-99.106) -161.427,-98.466 ; CON3.6@-161.692,-99.106 cw(c-160.787,-99.106) -161.427,-98.466 ; CON3.6@-161.692,-99.106 cw(c-160.787,-99.106) -161.427,-98.466 ; CON3.6@-161.692,-99.106 cw(c-160.787,-99.106) -161.427,-98.466 ; CON3.6@-161.692,-99.106 cw(c-160.787,-99.106) -161.427,-98.466 ; CON3.6@-161.542,-99.106 cw(c-160.275,-99.106) -161.171,-98.21 ; CON3.6@-161.542,-99.106 cw(c-160.275,-99.106) -161.171,-98.21 ; CON3.6@-161.542,-99.106 cw(c-160.275,-99.106) -161.171,-98.21 ; CON3.6@-161.542,-99.106 cw(c-160.275,-99.106) -161.171,-98.21 ; CON3.6@-161.542,-99.106 cw(c-160.275,-99.106) -161.171,-98.21 ; -121.222,-104.3 cw(c-121.222,-104.722) v1@-120.924,-104.424 ; -121.222,-104.3 ccw(c-121.222,-103.878) v1@-120.924,-104.176 ; -121.222,-104.3 cw(c-121.222,-104.722) v1@-120.924,-104.424 ; -121.222,-104.3 ccw(c-121.222,-103.878) v1@-120.924,-104.176 ; -121.222,-104.3 cw(c-121.222,-104.722) v1@-120.924,-104.424 ; -121.222,-104.3 ccw(c-121.222,-103.878) v1@-120.924,-104.176 ; -121.222,-104.3 ccw(c-121.222,-103.878) v1@-120.924,-104.176 ; -121.222,-104.3 cw(c-121.222,-104.722) v1@-120.924,-104.424
  Bottom Layer w0.15: v1(-120.8,-104.3) -116.9,-100.4 -116.9,-87.6 -116.232,-86.932 ; v1@-120.8,-104.175 ccw(c-120.8,-103.873) -120.587,-104.087 ccw(c-120.373,-104.3) v1@-120.675,-104.3 ; -116.204,-86.904 -106.196,-86.904 J1.66@-105.571,-86.279 ; v1@-120.8,-104.125 ccw(c-120.8,-103.703) -120.501,-104.001 ; v1@-120.8,-104.125 ccw(c-120.8,-103.703) -120.501,-104.001 ; v1@-120.8,-104.125 ccw(c-120.8,-103.703) -120.501,-104.001 ; v1@-120.8,-104.125 ccw(c-120.8,-103.703) -120.501,-104.001 ; v1@-120.625,-104.3 cw(c-120.203,-104.3) -120.501,-104.001 ; v1@-120.625,-104.3 cw(c-120.203,-104.3) -120.501,-104.001 ; v1@-120.625,-104.3 cw(c-120.203,-104.3) -120.501,-104.001 ; v1@-120.625,-104.3 cw(c-120.203,-104.3) -120.501,-104.001 ; -105.87,-86.605 cw(c-105.571,-86.904) J1.66@-105.571,-86.482 ; -105.87,-86.605 ccw(c-106.168,-86.307) J1.66@-105.746,-86.307 ; -105.87,-86.605 cw(c-105.571,-86.904) J1.66@-105.571,-86.482 ; -105.87,-86.605 ccw(c-106.168,-86.307) J1.66@-105.746,-86.307 ; -105.87,-86.605 cw(c-105.571,-86.904) J1.66@-105.571,-86.482 ; -105.87,-86.605 ccw(c-106.168,-86.307) J1.66@-105.746,-86.307 ; -106.171,-86.879 ccw(c-106.717,-86.333) -105.945,-86.295 cw(c-106.717,-86.333) -106.171,-86.879 ; -106.09,-86.799 cw(c-105.621,-87.268) -105.621,-86.604 ccw(c-105.621,-87.268) -106.09,-86.799 ; -105.931,-86.64 ccw(c-106.261,-86.311) -105.796,-86.288 cw(c-106.261,-86.311) -105.931,-86.64
AIN2: CON3.7 J1.67 | length 101.5
  Top Layer w0.15: CON3.7@-160.067,-97.106 -157.594,-97.106 -150.9,-103.8 v1(-119.1,-103.8) ; v1@-119.188,-103.888 ccw(c-119.402,-104.102) -119.402,-103.8 ccw(c-119.402,-103.498) v1@-119.188,-103.712 ; CON3.7@-159.802,-97.372 cw(c-159.162,-98.012) -159.162,-97.106 ; CON3.7@-159.802,-97.372 cw(c-159.162,-98.012) -159.162,-97.106 ; CON3.7@-159.802,-97.372 cw(c-159.162,-98.012) -159.162,-97.106 ; CON3.7@-159.802,-97.372 cw(c-159.162,-98.012) -159.162,-97.106 ; CON3.7@-159.802,-97.372 cw(c-159.162,-98.012) -159.162,-97.106 ; CON3.7@-159.802,-96.841 ccw(c-159.162,-96.201) -159.162,-97.106 ; CON3.7@-159.802,-96.841 ccw(c-159.162,-96.201) -159.162,-97.106 ; CON3.7@-159.802,-96.841 ccw(c-159.162,-96.201) -159.162,-97.106 ; CON3.7@-159.802,-96.841 ccw(c-159.162,-96.201) -159.162,-97.106 ; CON3.7@-159.802,-96.841 ccw(c-159.162,-96.201) -159.162,-97.106 ; CON3.7@-159.696,-97.478 cw(c-158.8,-98.374) -158.8,-97.106 ; CON3.7@-159.696,-97.478 cw(c-158.8,-98.374) -158.8,-97.106 ; CON3.7@-159.696,-97.478 cw(c-158.8,-98.374) -158.8,-97.106 ; CON3.7@-159.696,-97.478 cw(c-158.8,-98.374) -158.8,-97.106 ; CON3.7@-159.696,-97.478 cw(c-158.8,-98.374) -158.8,-97.106 ; CON3.7@-159.696,-96.735 ccw(c-158.8,-95.839) -158.8,-97.106 ; CON3.7@-159.696,-96.735 ccw(c-158.8,-95.839) -158.8,-97.106 ; CON3.7@-159.696,-96.735 ccw(c-158.8,-95.839) -158.8,-97.106 ; CON3.7@-159.696,-96.735 ccw(c-158.8,-95.839) -158.8,-97.106 ; CON3.7@-159.696,-96.735 ccw(c-158.8,-95.839) -158.8,-97.106 ; -119.522,-103.8 cw(c-119.522,-104.222) v1@-119.224,-103.924 ; -119.522,-103.8 ccw(c-119.522,-103.378) v1@-119.224,-103.676 ; -119.522,-103.8 cw(c-119.522,-104.222) v1@-119.224,-103.924 ; -119.522,-103.8 ccw(c-119.522,-103.378) v1@-119.224,-103.676 ; -119.522,-103.8 cw(c-119.522,-104.222) v1@-119.224,-103.924 ; -119.522,-103.8 ccw(c-119.522,-103.378) v1@-119.224,-103.676 ; -119.522,-103.8 ccw(c-119.522,-103.378) v1@-119.224,-103.676 ; -119.522,-103.8 cw(c-119.522,-104.222) v1@-119.224,-103.924
  Bottom Layer w0.15: v1(-119.1,-103.8) -116.15,-100.85 -116.15,-94.35 -114.6,-92.8 -114.6,-88.3 -113.877,-87.577 J1.67@-106.841,-87.577 ; v1@-119.1,-103.675 ccw(c-119.1,-103.373) -118.887,-103.587 ccw(c-118.673,-103.8) v1@-118.975,-103.8 ; v1@-119.1,-103.625 ccw(c-119.1,-103.203) -118.801,-103.501 ; v1@-119.1,-103.625 ccw(c-119.1,-103.203) -118.801,-103.501 ; v1@-119.1,-103.625 ccw(c-119.1,-103.203) -118.801,-103.501 ; v1@-119.1,-103.625 ccw(c-119.1,-103.203) -118.801,-103.501 ; v1@-118.925,-103.8 cw(c-118.503,-103.8) -118.801,-103.501 ; v1@-118.925,-103.8 cw(c-118.503,-103.8) -118.801,-103.501 ; v1@-118.925,-103.8 cw(c-118.503,-103.8) -118.801,-103.501 ; v1@-118.925,-103.8 cw(c-118.503,-103.8) -118.801,-103.501 ; -107.625,-87.577 cw(c-107.625,-88.362) J1.67@-107.071,-87.807 ; -107.625,-87.577 ccw(c-107.625,-86.793) J1.67@-107.071,-87.348 ; -107.625,-87.577 cw(c-107.625,-88.362) J1.67@-107.071,-87.807 ; -107.625,-87.577 ccw(c-107.625,-86.793) J1.67@-107.071,-87.348 ; -107.625,-87.577 cw(c-107.625,-88.362) J1.67@-107.071,-87.807 ; -107.625,-87.577 ccw(c-107.625,-86.793) J1.67@-107.071,-87.348 ; J1.67@-107.263,-87.577 cw(c-107.263,-88) J1.67@-106.965,-87.701 ; J1.67@-107.263,-87.577 ccw(c-107.263,-87.155) J1.67@-106.965,-87.454 ; J1.67@-107.263,-87.577 cw(c-107.263,-88) J1.67@-106.965,-87.701 ; J1.67@-107.263,-87.577 ccw(c-107.263,-87.155) J1.67@-106.965,-87.454 ; J1.67@-107.263,-87.577 cw(c-107.263,-88) J1.67@-106.965,-87.701 ; J1.67@-107.263,-87.577 ccw(c-107.263,-87.155) J1.67@-106.965,-87.454 ; -107.743,-87.577 ccw(c-107.743,-86.697) -107.121,-87.32 cw(c-107.743,-86.697) -107.743,-87.577 ; -107.608,-87.577 cw(c-107.608,-88.266) -107.121,-87.779 ccw(c-107.608,-88.266) -107.608,-87.577 ; -107.381,-87.577 ccw(c-107.381,-87.059) -107.015,-87.426 cw(c-107.381,-87.059) -107.381,-87.577
AIN3: J1.64
CAM_HREF: CON1.6 J2.24 | length 83.8
  Top Layer w0.15: v1@-150.305,-30.405 -141.8,-38.91 -141.8,-58.497 -142.921,-59.618 J2.24@-145.703,-59.618 ; v1@-150.293,-30.542 cw(c-150.293,-30.844) -150.08,-30.631 cw(c-149.866,-30.417) v1@-150.168,-30.417 ; v1@-150.293,-30.592 cw(c-150.293,-31.015) -149.994,-30.716 ; v1@-150.293,-30.592 cw(c-150.293,-31.015) -149.994,-30.716 ; v1@-150.293,-30.592 cw(c-150.293,-31.015) -149.994,-30.716 ; v1@-150.293,-30.592 cw(c-150.293,-31.015) -149.994,-30.716 ; v1@-150.118,-30.417 ccw(c-149.695,-30.417) -149.994,-30.716 ; v1@-150.118,-30.417 ccw(c-149.695,-30.417) -149.994,-30.716 ; v1@-150.118,-30.417 ccw(c-149.695,-30.417) -149.994,-30.716 ; v1@-150.118,-30.417 ccw(c-149.695,-30.417) -149.994,-30.716 ; J2.24@-145.579,-59.742 cw(c-145.28,-60.041) J2.24@-145.28,-59.618 ; J2.24@-145.579,-59.742 cw(c-145.28,-60.041) J2.24@-145.28,-59.618 ; J2.24@-145.579,-59.742 cw(c-145.28,-60.041) J2.24@-145.28,-59.618 ; J2.24@-145.579,-59.494 ccw(c-145.28,-59.196) J2.24@-145.28,-59.618 ; J2.24@-145.579,-59.494 ccw(c-145.28,-59.196) J2.24@-145.28,-59.618 ; J2.24@-145.579,-59.494 ccw(c-145.28,-59.196) J2.24@-145.28,-59.618 ; J2.24@-145.473,-59.848 cw(c-144.918,-60.403) -144.918,-59.618 ; J2.24@-145.473,-59.848 cw(c-144.918,-60.403) -144.918,-59.618 ; J2.24@-145.473,-59.848 cw(c-144.918,-60.403) -144.918,-59.618 ; J2.24@-145.473,-59.388 ccw(c-144.918,-58.833) -144.918,-59.618 ; J2.24@-145.473,-59.388 ccw(c-144.918,-58.833) -144.918,-59.618 ; J2.24@-145.473,-59.388 ccw(c-144.918,-58.833) -144.918,-59.618 ; J2.24@-145.529,-59.733 cw(c-145.251,-60.011) -145.251,-59.618 ccw(c-145.251,-60.011) J2.24@-145.529,-59.733 ; J2.24@-145.529,-59.486 ccw(c-145.209,-59.166) -145.209,-59.618 cw(c-145.209,-59.166) J2.24@-145.529,-59.486 ; J2.24@-145.423,-59.839 cw(c-144.889,-60.373) -144.889,-59.618 ccw(c-144.889,-60.373) J2.24@-145.423,-59.839 ; J2.24@-145.423,-59.38 ccw(c-144.847,-58.804) -144.847,-59.618 cw(c-144.847,-58.804) J2.24@-145.423,-59.38
  Bottom Layer w0.15: v1@-150.299,-30.4 -141.2,-30.4 -139.394,-28.594 CON1.6@-139.394,-25.203 ; v1@-150.205,-30.506 cw(c-149.95,-30.76) -149.95,-30.4 ; v1@-150.205,-30.329 ccw(c-150.032,-30.157) -150.032,-30.4 ; v1@-150.169,-30.541 cw(c-149.829,-30.881) -149.829,-30.4 ; v1@-150.169,-30.541 cw(c-149.829,-30.881) -149.829,-30.4 ; v1@-150.169,-30.541 cw(c-149.829,-30.881) -149.829,-30.4 ; v1@-150.169,-30.541 cw(c-149.829,-30.881) -149.829,-30.4 ; v1@-150.169,-30.293 ccw(c-149.912,-30.036) -149.912,-30.4 ; v1@-150.169,-30.293 ccw(c-149.912,-30.036) -149.912,-30.4 ; v1@-150.169,-30.293 ccw(c-149.912,-30.036) -149.912,-30.4 ; v1@-150.169,-30.293 ccw(c-149.912,-30.036) -149.912,-30.4 ; CON1.6@-139.765,-25.574 cw(c-140.661,-26.47) -139.394,-26.47 ; CON1.6@-139.765,-25.574 cw(c-140.661,-26.47) -139.394,-26.47 ; CON1.6@-139.765,-25.574 cw(c-140.661,-26.47) -139.394,-26.47 ; CON1.6@-139.765,-25.574 cw(c-140.661,-26.47) -139.394,-26.47 ; CON1.6@-139.765,-25.574 cw(c-140.661,-26.47) -139.394,-26.47 ; CON1.6@-139.659,-25.468 cw(c-140.299,-26.108) -139.394,-26.108 ; CON1.6@-139.659,-25.468 cw(c-140.299,-26.108) -139.394,-26.108 ; CON1.6@-139.659,-25.468 cw(c-140.299,-26.108) -139.394,-26.108 ; CON1.6@-139.659,-25.468 cw(c-140.299,-26.108) -139.394,-26.108 ; CON1.6@-139.659,-25.468 cw(c-140.299,-26.108) -139.394,-26.108 ; -139.394,-26.47 cw(c-138.126,-26.47) CON1.6@-139.022,-25.574 ; -139.394,-26.47 cw(c-138.126,-26.47) CON1.6@-139.022,-25.574 ; -139.394,-26.47 cw(c-138.126,-26.47) CON1.6@-139.022,-25.574 ; -139.394,-26.47 cw(c-138.126,-26.47) CON1.6@-139.022,-25.574 ; -139.394,-26.47 cw(c-138.126,-26.47) CON1.6@-139.022,-25.574 ; -139.394,-26.108 cw(c-138.488,-26.108) CON1.6@-139.128,-25.468 ; -139.394,-26.108 cw(c-138.488,-26.108) CON1.6@-139.128,-25.468 ; -139.394,-26.108 cw(c-138.488,-26.108) CON1.6@-139.128,-25.468 ; -139.394,-26.108 cw(c-138.488,-26.108) CON1.6@-139.128,-25.468 ; -139.394,-26.108 cw(c-138.488,-26.108) CON1.6@-139.128,-25.468
  other v1: -150.293,-30.417
CAM_PCLK: CON1.8 J2.26 | length 82.7
  Top Layer w0.15: v1@-149.498,-29.499 cw(c-149.498,-29.801) -149.284,-29.587 cw(c-149.071,-29.374) v1@-149.373,-29.374 ; v1(-149.498,-29.374) -140.5,-38.372 -140.5,-58.995 -142.394,-60.889 J2.26@-145.703,-60.889 ; v1@-149.498,-29.549 cw(c-149.498,-29.971) -149.199,-29.673 ; v1@-149.498,-29.549 cw(c-149.498,-29.971) -149.199,-29.673 ; v1@-149.498,-29.549 cw(c-149.498,-29.971) -149.199,-29.673 ; v1@-149.498,-29.549 cw(c-149.498,-29.971) -149.199,-29.673 ; v1@-149.323,-29.374 ccw(c-148.9,-29.374) -149.199,-29.673 ; v1@-149.323,-29.374 ccw(c-148.9,-29.374) -149.199,-29.673 ; v1@-149.323,-29.374 ccw(c-148.9,-29.374) -149.199,-29.673 ; v1@-149.323,-29.374 ccw(c-148.9,-29.374) -149.199,-29.673 ; J2.26@-145.579,-61.013 cw(c-145.28,-61.311) J2.26@-145.28,-60.889 ; J2.26@-145.579,-61.013 cw(c-145.28,-61.311) J2.26@-145.28,-60.889 ; J2.26@-145.579,-61.013 cw(c-145.28,-61.311) J2.26@-145.28,-60.889 ; J2.26@-145.579,-60.765 ccw(c-145.28,-60.466) J2.26@-145.28,-60.889 ; J2.26@-145.579,-60.765 ccw(c-145.28,-60.466) J2.26@-145.28,-60.889 ; J2.26@-145.579,-60.765 ccw(c-145.28,-60.466) J2.26@-145.28,-60.889 ; J2.26@-145.473,-61.119 cw(c-144.918,-61.674) -144.918,-60.889 ; J2.26@-145.473,-61.119 cw(c-144.918,-61.674) -144.918,-60.889 ; J2.26@-145.473,-61.119 cw(c-144.918,-61.674) -144.918,-60.889 ; J2.26@-145.473,-60.659 ccw(c-144.918,-60.104) -144.918,-60.889 ; J2.26@-145.473,-60.659 ccw(c-144.918,-60.104) -144.918,-60.889 ; J2.26@-145.473,-60.659 ccw(c-144.918,-60.104) -144.918,-60.889 ; J2.26@-145.529,-60.756 ccw(c-145.207,-60.434) -145.207,-60.889 cw(c-145.207,-60.434) J2.26@-145.529,-60.756 ; J2.26@-145.423,-61.109 cw(c-144.891,-61.641) -144.891,-60.889 ccw(c-144.891,-61.641) J2.26@-145.423,-61.109 ; J2.26@-145.423,-60.65 ccw(c-144.845,-60.072) -144.845,-60.889 cw(c-144.845,-60.072) J2.26@-145.423,-60.65
  Bottom Layer w0.15: v1@-149.524,-29.4 -143.3,-29.4 -141.394,-27.494 CON1.8@-141.394,-25.203 ; v1@-149.409,-29.462 cw(c-149.259,-29.612) v1@-149.259,-29.4 ; v1@-149.409,-29.285 ccw(c-149.133,-29.009) -149.133,-29.4 ; v1@-149.374,-29.498 cw(c-149.139,-29.733) -149.139,-29.4 ; v1@-149.374,-29.498 cw(c-149.139,-29.733) -149.139,-29.4 ; v1@-149.374,-29.498 cw(c-149.139,-29.733) -149.139,-29.4 ; v1@-149.374,-29.498 cw(c-149.139,-29.733) -149.139,-29.4 ; v1@-149.374,-29.25 ccw(c-149.012,-28.888) -149.012,-29.4 ; v1@-149.374,-29.25 ccw(c-149.012,-28.888) -149.012,-29.4 ; v1@-149.374,-29.25 ccw(c-149.012,-28.888) -149.012,-29.4 ; v1@-149.374,-29.25 ccw(c-149.012,-28.888) -149.012,-29.4 ; CON1.8@-141.765,-25.574 cw(c-142.661,-26.47) -141.394,-26.47 ; CON1.8@-141.765,-25.574 cw(c-142.661,-26.47) -141.394,-26.47 ; CON1.8@-141.765,-25.574 cw(c-142.661,-26.47) -141.394,-26.47 ; CON1.8@-141.765,-25.574 cw(c-142.661,-26.47) -141.394,-26.47 ; CON1.8@-141.765,-25.574 cw(c-142.661,-26.47) -141.394,-26.47 ; CON1.8@-141.659,-25.468 cw(c-142.299,-26.108) -141.394,-26.108 ; CON1.8@-141.659,-25.468 cw(c-142.299,-26.108) -141.394,-26.108 ; CON1.8@-141.659,-25.468 cw(c-142.299,-26.108) -141.394,-26.108 ; CON1.8@-141.659,-25.468 cw(c-142.299,-26.108) -141.394,-26.108 ; CON1.8@-141.659,-25.468 cw(c-142.299,-26.108) -141.394,-26.108 ; -141.394,-26.47 cw(c-140.126,-26.47) CON1.8@-141.022,-25.574 ; -141.394,-26.47 cw(c-140.126,-26.47) CON1.8@-141.022,-25.574 ; -141.394,-26.47 cw(c-140.126,-26.47) CON1.8@-141.022,-25.574 ; -141.394,-26.47 cw(c-140.126,-26.47) CON1.8@-141.022,-25.574 ; -141.394,-26.47 cw(c-140.126,-26.47) CON1.8@-141.022,-25.574 ; -141.394,-26.108 cw(c-140.488,-26.108) CON1.8@-141.128,-25.468 ; -141.394,-26.108 cw(c-140.488,-26.108) CON1.8@-141.128,-25.468 ; -141.394,-26.108 cw(c-140.488,-26.108) CON1.8@-141.128,-25.468 ; -141.394,-26.108 cw(c-140.488,-26.108) CON1.8@-141.128,-25.468 ; -141.394,-26.108 cw(c-140.488,-26.108) CON1.8@-141.128,-25.468
CAM_VSYNC: CON1.7 J2.22 | length 85.1
  Top Layer w0.15: v1@-151.854,-30.025 cw(c-151.854,-30.456) -151.549,-30.151 ; v1@-151.827,-29.873 -142.5,-39.2 -142.5,-57.4 -143.447,-58.347 J2.22@-145.703,-58.347 ; v1@-151.729,-29.9 ccw(c-151.556,-29.9) v1@-151.678,-30.022 ; v1@-151.854,-30.075 cw(c-151.854,-30.627) -151.463,-30.237 ; v1@-151.854,-30.075 cw(c-151.854,-30.627) -151.463,-30.237 ; v1@-151.854,-30.075 cw(c-151.854,-30.627) -151.463,-30.237 ; v1@-151.854,-30.075 cw(c-151.854,-30.627) -151.463,-30.237 ; v1@-151.679,-29.9 ccw(c-151.385,-29.9) -151.593,-30.107 ; v1@-151.679,-29.9 ccw(c-151.385,-29.9) -151.593,-30.107 ; v1@-151.679,-29.9 ccw(c-151.385,-29.9) -151.593,-30.107 ; v1@-151.679,-29.9 ccw(c-151.385,-29.9) -151.593,-30.107 ; J2.22@-145.579,-58.471 cw(c-145.28,-58.77) J2.22@-145.28,-58.347 ; J2.22@-145.579,-58.471 cw(c-145.28,-58.77) J2.22@-145.28,-58.347 ; J2.22@-145.579,-58.471 cw(c-145.28,-58.77) J2.22@-145.28,-58.347 ; J2.22@-145.579,-58.223 ccw(c-145.28,-57.925) J2.22@-145.28,-58.347 ; J2.22@-145.579,-58.223 ccw(c-145.28,-57.925) J2.22@-145.28,-58.347 ; J2.22@-145.579,-58.223 ccw(c-145.28,-57.925) J2.22@-145.28,-58.347 ; J2.22@-145.473,-58.577 cw(c-144.918,-59.132) -144.918,-58.347 ; J2.22@-145.473,-58.577 cw(c-144.918,-59.132) -144.918,-58.347 ; J2.22@-145.473,-58.577 cw(c-144.918,-59.132) -144.918,-58.347 ; J2.22@-145.473,-58.117 ccw(c-144.918,-57.563) -144.918,-58.347 ; J2.22@-145.473,-58.117 ccw(c-144.918,-57.563) -144.918,-58.347 ; J2.22@-145.473,-58.117 ccw(c-144.918,-57.563) -144.918,-58.347 ; J2.22@-145.529,-58.463 cw(c-145.249,-58.743) -145.249,-58.347 ccw(c-145.249,-58.743) J2.22@-145.529,-58.463 ; J2.22@-145.529,-58.216 ccw(c-145.211,-57.898) -145.211,-58.347 cw(c-145.211,-57.898) J2.22@-145.529,-58.216 ; J2.22@-145.423,-58.569 cw(c-144.887,-59.105) -144.887,-58.347 ccw(c-144.887,-59.105) J2.22@-145.423,-58.569 ; J2.22@-145.423,-58.11 ccw(c-144.849,-57.536) -144.849,-58.347 cw(c-144.849,-57.536) J2.22@-145.423,-58.11
  Bottom Layer w0.15: v1(-151.854,-29.9) -142.5,-29.9 -140.4,-27.8 -140.4,-24.196 CON1.7@-141.394,-23.203 ; v1@-151.765,-29.988 cw(c-151.552,-30.202) -151.552,-29.9 cw(c-151.552,-29.598) v1@-151.765,-29.812 ; v1@-151.73,-30.024 cw(c-151.431,-30.322) -151.431,-29.9 ; v1@-151.73,-30.024 cw(c-151.431,-30.322) -151.431,-29.9 ; v1@-151.73,-30.024 cw(c-151.431,-30.322) -151.431,-29.9 ; v1@-151.73,-30.024 cw(c-151.431,-30.322) -151.431,-29.9 ; v1@-151.73,-29.776 ccw(c-151.431,-29.478) -151.431,-29.9 ; v1@-151.73,-29.776 ccw(c-151.431,-29.478) -151.431,-29.9 ; v1@-151.73,-29.776 ccw(c-151.431,-29.478) -151.431,-29.9 ; v1@-151.73,-29.776 ccw(c-151.431,-29.478) -151.431,-29.9 ; CON1.7@-141.394,-23.728 cw(c-141.394,-24.995) -140.497,-24.099 ; CON1.7@-141.394,-23.728 cw(c-141.394,-24.995) -140.497,-24.099 ; CON1.7@-141.394,-23.728 cw(c-141.394,-24.995) -140.497,-24.099 ; CON1.7@-141.394,-23.728 cw(c-141.394,-24.995) -140.497,-24.099 ; CON1.7@-141.394,-23.728 cw(c-141.394,-24.995) -140.497,-24.099 ; CON1.7@-141.394,-23.578 cw(c-141.394,-24.483) -140.753,-23.843 ; CON1.7@-141.394,-23.578 cw(c-141.394,-24.483) -140.753,-23.843 ; CON1.7@-141.394,-23.578 cw(c-141.394,-24.483) -140.753,-23.843 ; CON1.7@-141.394,-23.578 cw(c-141.394,-24.483) -140.753,-23.843 ; CON1.7@-141.394,-23.578 cw(c-141.394,-24.483) -140.753,-23.843 ; CON1.7@-141.019,-23.203 ccw(c-140.113,-23.203) -140.753,-23.843 ; CON1.7@-141.019,-23.203 ccw(c-140.113,-23.203) -140.753,-23.843 ; CON1.7@-141.019,-23.203 ccw(c-140.113,-23.203) -140.753,-23.843 ; CON1.7@-141.019,-23.203 ccw(c-140.113,-23.203) -140.753,-23.843 ; CON1.7@-141.019,-23.203 ccw(c-140.113,-23.203) -140.753,-23.843 ; CON1.7@-140.869,-23.203 ccw(c-139.601,-23.203) -140.497,-24.099 ; CON1.7@-140.869,-23.203 ccw(c-139.601,-23.203) -140.497,-24.099 ; CON1.7@-140.869,-23.203 ccw(c-139.601,-23.203) -140.497,-24.099 ; CON1.7@-140.869,-23.203 ccw(c-139.601,-23.203) -140.497,-24.099 ; CON1.7@-140.869,-23.203 ccw(c-139.601,-23.203) -140.497,-24.099